# EAGLE board CT_schematic (EAGLE 7.6.0)

Size 100 x 80 mm. Coordinates in mm from the lower left corner, seen from the top.
Outline: 0,0 100,0 100,80 0,80 0,0
Copper layers (1*16): Top 0.035mm / dielectric 1.5mm / Bottom 0.035mm
Design rules "default": minimum track width 10mil, minimum drill 24mil, track to track 8mil, track to pad 8mil, pad to pad 8mil, via to via 8mil, smd to smd 8mil, copper to edge 40mil, drill to drill 8mil, minimum pad ring 10mil, minimum via ring 8mil, stop-mask expansion 4mil, vias tented up to drill 0mil, thermal gap 10mil

## Footprints (pad centres in the part's own frame; a part is rotated, then mirrored left to right if it is on the bottom)
C0603 = smd 0.8 x 0.8: 1 -0.762,0; 2 0.762,0
C0402 = smd 0.5 x 0.5: 1 -0.508,0; 2 0.508,0
C1206 = smd 1.3 x 1.6: 1 -1.524,0; 2 1.524,0
C0805 = smd 1.2 x 1.3: 1 -1.016,0; 2 1.016,0
C1210 = smd 1.2 x 2.5: 1 -1.524,0; 2 1.524,0
R0603 = smd 0.8 x 0.8: 1 -0.762,0; 2 0.762,0
EXV-9H = smd 3.505 x 1.676: 1 -2.857,0; 2 2.857,0
L0603 = smd 0.8 x 0.8: 1 -0.762,0; 2 0.762,0
DR1040 = smd 1.6 x 3.2: 1 -4.458,0; 2 4.458,0
PJ-037B_PACKAGE = drill 3.7 square: 1 12,0 | drill 3.2 square: 2 6,0
UFBGA169 = smd 0.35 x 0.35: A1 -3.9,3.9; A2 -3.25,3.9; A3 -2.6,3.9; A4 -1.95,3.9; A5 -1.3,3.9; A6 -0.65,3.9; A7 0,3.9; A8 0.65,3.9; A9 1.3,3.9; A10 1.95,3.9; A11 2.6,3.9; A12 3.25,3.9; A13 3.9,3.9; B1 -3.9,3.25; B2 -3.25,3.25; B3 -2.6,3.25; B4 -1.95,3.25; B5 -1.3,3.25; B6 -0.65,3.25; B7 0,3.25; B8 0.65,3.25; B9 1.3,3.25; B10 1.95,3.25; B11 2.6,3.25; B12 3.25,3.25; B13 3.9,3.25; C1 -3.9,2.6; C2 -3.25,2.6; C3 -2.6,2.6; C4 -1.95,2.6; C5 -1.3,2.6; C6 -0.65,2.6; C7 0,2.6; C8 0.65,2.6; C9 1.3,2.6; C10 1.95,2.6; C11 2.6,2.6; C12 3.25,2.6; C13 3.9,2.6; D1 -3.9,1.95; D2 -3.25,1.95; D3 -2.6,1.95; D4 -1.95,1.95; D5 -1.3,1.95; D6 -0.65,1.95; D7 0,1.95; D8 0.65,1.95; D9 1.3,1.95; D10 1.95,1.95; D11 2.6,1.95; D12 3.25,1.95; D13 3.9,1.95; E1 -3.9,1.3; E2 -3.25,1.3; E3 -2.6,1.3; E4 -1.95,1.3; E5 -1.3,1.3; E6 -0.65,1.3; E7 0,1.3; E8 0.65,1.3; E9 1.3,1.3; E10 1.95,1.3; E11 2.6,1.3; E12 3.25,1.3; E13 3.9,1.3; F1 -3.9,0.65; F2 -3.25,0.65; F3 -2.6,0.65; F4 -1.95,0.65; F5 -1.3,0.65; F6 -0.65,0.65; F7 0,0.65; F8 0.65,0.65; F9 1.3,0.65; F10 1.95,0.65; F11 2.6,0.65; F12 3.25,0.65; F13 3.9,0.65; G1 -3.9,0; G2 -3.25,0; G3 -2.6,0; G4 -1.95,0; G5 -1.3,0; G6 -0.65,0; G7 0,0; G8 0.65,0; G9 1.3,0; G10 1.95,0; G11 2.6,0; G12 3.25,0; G13 3.9,0; H1 -3.9,-0.65; H2 -3.25,-0.65; H3 -2.6,-0.65; H4 -1.95,-0.65; H5 -1.3,-0.65; H6 -0.65,-0.65; H7 0,-0.65; H8 0.65,-0.65; H9 1.3,-0.65; H10 1.95,-0.65; H11 2.6,-0.65; H12 3.25,-0.65; H13 3.9,-0.65; J1 -3.9,-1.3; J2 -3.25,-1.3; J3 -2.6,-1.3; J4 -1.95,-1.3; J5 -1.3,-1.3; J6 -0.65,-1.3; J7 0,-1.3; J8 0.65,-1.3; J9 1.3,-1.3; J10 1.95,-1.3; J11 2.6,-1.3; J12 3.25,-1.3; J13 3.9,-1.3; K1 -3.9,-1.95; K2 -3.25,-1.95; K3 -2.6,-1.95; K4 -1.95,-1.95; K5 -1.3,-1.95; K6 -0.65,-1.95; K7 0,-1.95; K8 0.65,-1.95; K9 1.3,-1.95; K10 1.95,-1.95; K11 2.6,-1.95; K12 3.25,-1.95; K13 3.9,-1.95; L1 -3.9,-2.6; L2 -3.25,-2.6; L3 -2.6,-2.6; L4 -1.95,-2.6; L5 -1.3,-2.6; L6 -0.65,-2.6; L7 0,-2.6; L8 0.65,-2.6; L9 1.3,-2.6; L10 1.95,-2.6; L11 2.6,-2.6; L12 3.25,-2.6; L13 3.9,-2.6; M1 -3.9,-3.25; M2 -3.25,-3.25; M3 -2.6,-3.25; M4 -1.95,-3.25; M5 -1.3,-3.25; M6 -0.65,-3.25; M7 0,-3.25; M8 0.65,-3.25; M9 1.3,-3.25; M10 1.95,-3.25; M11 2.6,-3.25; M12 3.25,-3.25; M13 3.9,-3.25; N1 -3.9,-3.9; N2 -3.25,-3.9; N3 -2.6,-3.9; N4 -1.95,-3.9; N5 -1.3,-3.9; N6 -0.65,-3.9; N7 0,-3.9; N8 0.65,-3.9; N9 1.3,-3.9; N10 1.95,-3.9; N11 2.6,-3.9; N12 3.25,-3.9; N13 3.9,-3.9
ARDUCAM = drill 1 pad 1.8 square: 1 0,0 | drill 1 pad 1.8: 2 0,2.54; 3 2.54,0; 4 2.54,2.54; 5 5.08,0; 6 5.08,2.54; 7 7.62,0; 8 7.62,2.54; 9 10.16,0; 10 10.16,2.54; 11 12.7,0; 12 12.7,2.54; 13 15.24,0; 14 15.24,2.54; 15 17.78,0; 16 17.78,2.54; 17 20.32,0; 18 20.32,2.54; 19 22.86,0; 20 22.86,2.54
TST-110-05-T-D-RA = drill 1 pad 1.7 square: 1 0,0 | drill 1 pad 1.7: 2 0,2.54; 3 2.54,0; 4 2.54,2.54; 5 5.08,0; 6 5.08,2.54; 7 7.62,0; 8 7.62,2.54; 9 10.16,0; 10 10.16,2.54; 11 12.7,0; 12 12.7,2.54; 13 15.24,0; 14 15.24,2.54; 15 17.78,0; 16 17.78,2.54; 17 20.32,0; 18 20.32,2.54; 19 22.86,0; 20 22.86,2.54
M10382 = smd 1 x 1: 1 0,0; 2 -1.6,0; 3 -3.2,0; 4 -3.2,-2; 5 -3.2,-3.6; 6 -3.2,-5.2; 7 -3.2,-6.8; 8 -3.2,-8.4; 9 -3.2,-10; 10 -3.2,-11.6; 11 -3.2,-13.2; 12 -3.2,-14.8; 13 -3.2,-16.4; 14 -3.2,-18; 15 -3.2,-19.6; 16 -3.2,-21.2; 17 -3.2,-22.8; 18 -0.55,-22.8; 19 1.05,-22.8; 20 2.65,-22.8; 21 5.3,-22.8; 22 5.3,-21.2; 23 5.3,-19.6; 24 5.3,-18; 25 5.3,-16.4; 26 5.3,-14.8; 27 5.3,-13.2; 28 5.3,-11.6; 29 5.3,-10; 30 5.3,-8.4; 31 5.3,-6.8; 32 5.3,-5.2; 33 5.3,-3.6; 34 5.3,-2; 35 5.3,0; 36 3.7,0
RTL8201FL-VB-CG = smd 0.27 x 1: 1 0,0; 2 0.5,0; 3 1,0; 4 1.5,0; 5 2,0; 6 2.5,0; 7 3,0; 8 3.5,0; 9 4,0; 10 4.5,0; 11 5,0; 12 5.5,0; 25 5.5,8; 26 5,8; 27 4.5,8; 28 4,8; 29 3.5,8; 30 3,8; 31 2.5,8; 32 2,8; 33 1.5,8; 34 1,8; 35 0.5,8; 36 0,8 | smd 1 x 0.27: 13 6.75,1.25; 14 6.75,1.75; 15 6.75,2.25; 16 6.75,2.75; 17 6.75,3.25; 18 6.75,3.75; 19 6.75,4.25; 20 6.75,4.75; 21 6.75,5.25; 22 6.75,5.75; 23 6.75,6.25; 24 6.75,6.75; 37 -1.25,6.75; 38 -1.25,6.25; 39 -1.25,5.75; 40 -1.25,5.25; 41 -1.25,4.75; 42 -1.25,4.25; 43 -1.25,3.75; 44 -1.25,3.25; 45 -1.25,2.75; 46 -1.25,2.25; 47 -1.25,1.75; 48 -1.25,1.25
7498011122R = smd 0.71 x 2.29: 1 -3.545,-3.18; 2 -2.525,-3.18; 3 -1.505,-3.18; 4 -0.485,-3.18; 5 0.535,-3.18; 6 1.555,-3.18; 8 3.595,-3.18; 9 5.635,-3.18; 10 6.655,-3.18; 11 -6.605,-3.18; 12 -5.585,-3.18 | smd 1.4 x 2.54: 13 -8.51,10.2; 14 8.51,10.2 | hole 1.4: -3.5,0; 3.5,0
ABS07-32.768KHZ-7-T = smd 1.1 x 2.4: 1 -2.5,0; 2 0,0
ABLS-25.000MHZ-B2F-T = smd 5.6 x 2.8: 1 -3.81,0; 2 5.69,0
ASFL1 = smd 1.7 x 1.5: 1 -1.27,-1.1; 2 1.27,-1.1; 3 1.27,1.1; 4 -1.27,1.1
IDT74FCT38072 = smd 0.51 x 1: 1 0,0; 2 1.27,0; 3 2.54,0; 4 3.81,0; 5 3.81,4.95; 6 2.54,4.95; 7 1.27,4.95; 8 0,4.95
WSON-8 = smd 0.3 x 0.6: 1 -0.75,0; 2 0.05,0; 3 0.85,0; 4 1.65,0; 5 1.65,3.8; 6 0.85,3.8; 7 0.05,3.8; 8 -0.75,3.8 | smd 3 x 2.6: PAD 0.45,1.9
HTSSOP14 = smd 1.676 x 0.356: 1 -2.8,1.95; 2 -2.8,1.3; 3 -2.8,0.65; 4 -2.8,0; 5 -2.8,-0.65; 6 -2.8,-1.3; 7 -2.8,-1.95; 8 2.8,-1.95; 9 2.8,-1.3; 10 2.8,-0.65; 11 2.8,0; 12 2.8,0.65; 13 2.8,1.3; 14 2.8,1.95 | smd 3 x 5: 15 0,0 | drill 0.4 pad 0.45: P$1 -0.75,1.5; P$2 0.75,1.5; P$3 -0.75,0; P$4 0.8,0; P$5 -0.75,-1.5; P$6 0.9,-1.5
QFN-38_UHF = smd 0.75 x 0.3: 1 -2.4,2.75; 2 -2.4,2.25; 3 -2.4,1.75; 4 -2.4,1.25; 6 -2.4,0.25; 7 -2.4,-0.25; 8 -2.4,-0.75; 9 -2.4,-1.25; 10 -2.4,-1.75; 11 -2.4,-2.25; 12 -2.4,-2.75; 20 2.4,-2.75; 21 2.4,-2.25; 22 2.4,-1.75; 23 2.4,-1.25; 24 2.4,-0.75; 25 2.4,-0.25; 26 2.4,0.25; 27 2.4,0.75; 28 2.4,1.25; 29 2.4,1.75; 30 2.4,2.25; 31 2.4,2.75 | smd 0.758 x 0.3: 5 -2.4,0.75 | smd 0.3 x 0.75: 13 -1.5,-3.4; 14 -1,-3.4; 15 -0.5,-3.4; 16 0,-3.4; 17 0.5,-3.4; 18 1,-3.4; 19 1.5,-3.4; 32 1.5,3.4; 33 1,3.4; 34 0.5,3.4; 35 0,3.4; 36 -0.5,3.4; 37 -1,3.4; 38 -1.5,3.4 | smd 3.2 x 5.2: 39 0,0
IRF8306MTRPBF = smd 0.9 x 1.85: 1 0,0; 2 0,-2.35; 6 6.4,0; 7 6.4,-2.35 | smd 0.75 x 0.75: 3 1.75,-1.175 | smd 1.45 x 0.87: 4 3.5,-0.565; 5 3.5,-1.785
SW_4-1437565-2 = smd 1.4 x 2.1: 1 -2.23,4.55; 2 -2.23,-4.55; 3 2.23,4.55; 4 2.23,-4.55
LGM67K-G1J2-24-Z = smd 0.8 x 1.4: A -2,0; C 0,0
NC7SZ125M5X = smd 1.3 x 0.7: 1 -1.3,0.95; 2 -1.3,0; 3 -1.3,-0.95; 4 1.3,-0.95; 5 1.3,0.95

## Placement (x,y rotation side)
C1  1e-06  [C0603]  -26.67,83.82 0 top  (outside the outline)
C2  1e-07  [C0603]  -30.48,83.82 0 top  (outside the outline)
C3  1e-07  [C0603]  -34.29,83.82 0 top  (outside the outline)
C4  1e-07  [C0603]  -38.1,83.82 0 top  (outside the outline)
C5  1e-07  [C0603]  -41.91,83.82 0 top  (outside the outline)
C6  1e-07  [C0603]  -45.72,83.82 0 top  (outside the outline)
C7  1e-07  [C0603]  -49.53,83.82 0 top  (outside the outline)
C8  1e-07  [C0603]  -53.34,83.82 0 top  (outside the outline)
C9  1e-07  [C0603]  -57.15,83.82 0 top  (outside the outline)
C10  1e-07  [C0603]  -60.96,83.82 0 top  (outside the outline)
C11  1e-07  [C0603]  -64.77,83.82 0 top  (outside the outline)
C12  1e-07  [C0603]  -68.58,83.82 0 top  (outside the outline)
C13  1e-07  [C0603]  -72.39,83.82 0 top  (outside the outline)
C14  1e-07  [C0603]  -76.2,83.82 0 top  (outside the outline)
C15  1e-07  [C0603]  -80.01,83.82 0 top  (outside the outline)
C16  1e-07  [C0603]  -83.82,83.82 0 top  (outside the outline)
C17  4.7e-06  [C0603]  -19.05,83.82 0 top  (outside the outline)
C18  1e-08  [C0603]  -87.63,83.82 0 top  (outside the outline)
C19  1e-06  [C0603]  -91.44,83.82 0 top  (outside the outline)
C20  1e-07  [C0402]  -50.8,93.98 0 top  (outside the outline)
C21  1e-07  [C0402]  -54.61,93.98 0 top  (outside the outline)
C22  1e-11  [C0402]  -58.42,93.98 0 top  (outside the outline)
C23  1e-11  [C0402]  -62.23,93.98 0 top  (outside the outline)
C24  1e-06  [C0603]  -15.24,88.9 0 top  (outside the outline)
C25  1e-07  [C0402]  -66.04,93.98 0 top  (outside the outline)
C26  1e-07  [C0402]  -69.85,93.98 0 top  (outside the outline)
C27  2.2e-11  [C0402]  -27.94,93.98 0 top  (outside the outline)
C28  2.2e-11  [C0402]  -31.75,93.98 0 top  (outside the outline)
C29  2.2e-08  [C0402]  -35.56,93.98 0 top  (outside the outline)
C30  1e-06  [C0603]  -19.05,88.9 0 top  (outside the outline)
C31  1e-07  [C0402]  -73.66,93.98 0 top  (outside the outline)
C32  1e-08  [C0402]  -77.47,93.98 0 top  (outside the outline)
C33  1e-06  [C0603]  -22.86,88.9 0 top  (outside the outline)
C34  1e-07  [C0402]  -81.28,93.98 0 top  (outside the outline)
C35  1e-08  [C0402]  -85.09,93.98 0 top  (outside the outline)
C36  1e-07  [C0402]  -88.9,93.98 0 top  (outside the outline)
C37  1e-07  [C0402]  -15.24,99.06 0 top  (outside the outline)
C38  2.7e-11  [C0402]  -39.37,93.98 0 top  (outside the outline)
C39  2.7e-11  [C0402]  -43.18,93.98 0 top  (outside the outline)
C40  1e-08  [C0402]  -19.05,99.06 0 top  (outside the outline)
C41  1e-08  [C0402]  -22.86,99.06 0 top  (outside the outline)
C42  1e-08  [C0402]  -26.67,99.06 0 top  (outside the outline)
C43  1e-05  [C1206]  -22.86,68.58 0 top  (outside the outline)
C44  1e-05  [C0805]  -59.69,67.31 0 top  (outside the outline)
C45  1e-06  [C0603]  -26.67,88.9 0 top  (outside the outline)
C46  3.3e-09  [C0402]  -46.99,93.98 0 top  (outside the outline)
C47  1e-07  [C0402]  -30.48,99.06 0 top  (outside the outline)
C48  2.2e-05  [C1210]  -87.63,60.96 0 top  (outside the outline)
C49  2.2e-05  [C1210]  -16.51,68.58 0 top  (outside the outline)
C50  1e-05  [C0805]  -64.77,67.31 0 top  (outside the outline)
C51  1e-05  [C0805]  -69.85,67.31 0 top  (outside the outline)
C52  1e-08  [C0402]  -34.29,99.06 0 top  (outside the outline)
C53  1e-05  [C1206]  -29.21,68.58 0 top  (outside the outline)
C54  1e-05  [C0805]  -74.93,67.31 0 top  (outside the outline)
C55  1e-07  [C0402]  -38.1,99.06 0 top  (outside the outline)
C56  2.2e-06  [C0603]  -22.86,83.82 0 top  (outside the outline)
C57  2.45e-08  [R0603]  -39.37,73.66 0 top  (outside the outline)
C58  2.8258362168397e-09  [R0603]  -85.09,67.31 0 top  (outside the outline)
C59  7.105e-09  [R0603]  -24.13,73.66 0 top  (outside the outline)
C60  0.0001  [EXV-9H]  -54.61,53.34 0 top  (outside the outline)
C61  0.0001  [EXV-9H]  -66.04,53.34 0 top  (outside the outline)
C62  1e-08  [C0402]  -41.91,99.06 0 top  (outside the outline)
C63  1e-08  [C0402]  -45.72,99.06 0 top  (outside the outline)
C64  1e-08  [C0402]  -49.53,99.06 0 top  (outside the outline)
C65  1e-08  [C0402]  -53.34,99.06 0 top  (outside the outline)
F1  240.0  [L0603]  -30.48,88.9 0 top  (outside the outline)
I1  97.0  [R0603]  -34.29,88.9 0 top  (outside the outline)
I5  2.5e-06  [DR1040]  -38.1,34.29 0 top  (outside the outline)
J1  PJ-037B  [PJ-037B_PACKAGE]  -90.17,7.62 0 top  (outside the outline)
R2  1000.0  [R0603]  -38.1,88.9 0 top  (outside the outline)
R7  4700.0  [R0603]  -41.91,88.9 0 top  (outside the outline)
R8  4700.0  [R0603]  -45.72,88.9 0 top  (outside the outline)
R9  4700.0  [R0603]  -49.53,88.9 0 top  (outside the outline)
R10  2200.0  [R0603]  -53.34,88.9 0 top  (outside the outline)
R12  2200.0  [R0603]  -57.15,88.9 0 top  (outside the outline)
R14  2200.0  [R0603]  -60.96,88.9 0 top  (outside the outline)
R16  2200.0  [R0603]  -64.77,88.9 0 top  (outside the outline)
R18  10000.0  [R0603]  -44.45,73.66 0 top  (outside the outline)
R19  10000.0  [R0603]  -49.53,73.66 0 top  (outside the outline)
R20  10000.0  [R0603]  -54.61,73.66 0 top  (outside the outline)
R21  10000.0  [R0603]  -59.69,73.66 0 top  (outside the outline)
R22  10000.0  [R0603]  -64.77,73.66 0 top  (outside the outline)
R23  10000.0  [R0603]  -69.85,73.66 0 top  (outside the outline)
R24  10000.0  [R0603]  -74.93,73.66 0 top  (outside the outline)
R25  10000.0  [R0603]  -80.01,73.66 0 top  (outside the outline)
R26  10000.0  [R0603]  -85.09,73.66 0 top  (outside the outline)
R27  10000.0  [R0603]  -90.17,73.66 0 top  (outside the outline)
R28  0.1  [R0603]  -68.58,88.9 0 top  (outside the outline)
R29  0.1  [R0603]  -72.39,88.9 0 top  (outside the outline)
R30  200.0  [R0603]  -76.2,88.9 0 top  (outside the outline)
R31  200.0  [R0603]  -80.01,88.9 0 top  (outside the outline)
R32  2490.0  [R0603]  -83.82,88.9 0 top  (outside the outline)
R33  4700.0  [R0603]  -87.63,88.9 0 top  (outside the outline)
R34  10000.0  [R0603]  -15.24,78.74 0 top  (outside the outline)
R35  10000.0  [R0603]  -20.32,78.74 0 top  (outside the outline)
R36  10000.0  [R0603]  -25.4,78.74 0 top  (outside the outline)
R37  10000.0  [R0603]  -30.48,78.74 0 top  (outside the outline)
R38  10000.0  [R0603]  -35.56,78.74 0 top  (outside the outline)
R39  10000.0  [R0603]  -40.64,78.74 0 top  (outside the outline)
R40  100000.0  [R0603]  -29.21,73.66 0 top  (outside the outline)
R41  200.0  [R0603]  -91.44,88.9 0 top  (outside the outline)
R42  1000.0  [R0603]  -15.24,93.98 0 top  (outside the outline)
R43  71007.101651032  [R0603]  -19.05,73.66 0 top  (outside the outline)
R44  22000.0  [R0603]  -45.72,78.74 0 top  (outside the outline)
R45  100000.0  [R0603]  -34.29,73.66 0 top  (outside the outline)
R46  200.0  [R0603]  -19.05,93.98 0 top  (outside the outline)
R47  1000.0  [R0603]  -22.86,93.98 0 top  (outside the outline)
R48  10000.0  [R0603]  -50.8,78.74 0 top  (outside the outline)
R49  75000.0  [R0603]  -55.88,78.74 0 top  (outside the outline)
R50  10000.0  [R0603]  -60.96,78.74 0 top  (outside the outline)
R51  10000.0  [R0603]  -66.04,78.74 0 top  (outside the outline)
R52  95300.0  [R0603]  -71.12,78.74 0 top  (outside the outline)
R53  95300.0  [R0603]  -76.2,78.74 0 top  (outside the outline)
R54  10000.0  [R0603]  -81.28,78.74 0 top  (outside the outline)
R55  10000.0  [R0603]  -86.36,78.74 0 top  (outside the outline)
R56  10000.0  [R0603]  -91.44,78.74 0 top  (outside the outline)
R57  48900.0  [R0603]  -15.24,83.82 0 top  (outside the outline)
U1  STM32F437AIH6  [UFBGA169]  -53.34,7.62 0 top  (outside the outline)
U2  arducam_ov2640  [ARDUCAM]  -59.69,58.42 0 top  (outside the outline)
U3  TST-110-05-T-D-RA  [TST-110-05-T-D-RA]  -46.99,50.8 0 top  (outside the outline)
U4  M10382  [M10382]  -39.37,24.13 0 top  (outside the outline)
U5  RTL8201FL-VB-CG  [RTL8201FL-VB-CG]  -73.66,3.81 0 top  (outside the outline)
U6  7498011122R  [7498011122R]  -22.86,7.62 0 top  (outside the outline)
U7  ABS07-32.768KHZ-7-T  [ABS07-32.768KHZ-7-T]  -27.94,60.96 0 top  (outside the outline)
U8  ABLS-25.000MHZ-B2F-T  [ABLS-25.000MHZ-B2F-T]  -85.09,53.34 0 top  (outside the outline)
U9  ASFL1-25MHZ-NCS  [ASFL1]  -46.99,44.45 0 top  (outside the outline)
U10  idt74fct38072  [IDT74FCT38072]  -76.2,41.91 0 top  (outside the outline)
U11  LP3878SDX-ADJ/NOPB  [WSON-8]  -91.44,31.75 0 top  (outside the outline)
U12  tps54325PWP  [HTSSOP14]  -67.31,60.96 0 top  (outside the outline)
U13  LP3878SDX-ADJ/NOPB  [WSON-8]  -30.48,43.18 0 top  (outside the outline)
U14  LTC2928CUHF#PBF  [QFN-38_UHF]  -54.61,44.45 0 top  (outside the outline)
U15  IRF8306MTRPbF  [IRF8306MTRPBF]  -57.15,34.29 0 top  (outside the outline)
U16  IRF8306MTRPbF  [IRF8306MTRPBF]  -72.39,34.29 0 top  (outside the outline)
U17  4-1437565-2  [SW_4-1437565-2]  -27.94,34.29 0 top  (outside the outline)
U18  Q65110A2395  [LGM67K-G1J2-24-Z]  -76.2,60.96 0 top  (outside the outline)
U19  nc7sz125m5x  [NC7SZ125M5X]  -34.29,67.31 0 top  (outside the outline)
U20  nc7sz125m5x  [NC7SZ125M5X]  -40.64,67.31 0 top  (outside the outline)
U21  nc7sz125m5x  [NC7SZ125M5X]  -46.99,67.31 0 top  (outside the outline)
U22  nc7sz125m5x  [NC7SZ125M5X]  -53.34,67.31 0 top  (outside the outline)

## Library data of the parts
C1-C65 F1 I1 I5 J1 R2 R7-R10 R12 R14 R16 R18-R57 U1-U22 = circuit_tree

## Nets
CLK_CRYSTAL_U1_E1: C22.1 U1.E1 U7.1
CLK_CRYSTAL_U1_F1: C23.1 U1.F1 U7.2
CLK_CRYSTAL_U5_42: C39.1 U5.42 U8.1
CLK_CRYSTAL_U5_43: C38.1 U5.43 U8.2
CLK_U1_G2: U1.G2 U10.6
CLK_U2_8: U2.8 U10.7
CLK_U10_3: U9.3 U10.3
GND: C1.2 C2.2 C3.2 C4.2 C5.2 C6.2 C7.2 C8.2 C9.2 C10.2 C11.2 C12.2 C13.2 C14.2 C15.2 C16.2 C17.2 C18.2 C19.2 C20.2 C21.2 C22.2 C23.2 C24.2 C25.2 C26.2 C27.2 C28.2 C29.2 C30.2 C31.2 C32.2 C33.2 C34.2 C35.2 C36.2 C37.2 C38.2 C39.2 C40.2 C41.2 C42.2 C43.2 C44.2 C45.2 C46.2 C48.2 C49.2 C50.2 C51.2 C52.2 C53.2 C54.2 C55.2 C56.2 C57.2 C58.2 C59.2 C60.2 C61.2 C62.2 C63.2 C64.2 C65.2 J1.2 R2.2 R20.2 R27.2 R28.2 R29.2 R32.2 R34.2 R36.2 R37.2 R38.2 R39.2 R42.2 R44.2 R47.2 R49.2 R52.2 R53.2 R54.2 R55.2 R56.2 U1.D7 U1.D11 U1.E7 U1.F5 U1.F6 U1.G7 U1.G9 U1.J1 U1.J2 U1.J6 U1.J7 U1.J10 U2.2 U2.20 U3.4 U3.6 U3.8 U3.10 U3.12 U3.14 U3.16 U3.18 U3.20 U4.2 U4.4 U4.14 U4.17 U4.21 U4.24 U4.26 U4.28 U4.33 U4.34 U4.35 U4.36 U5.7 U5.20 U5.33 U5.47 U6.11 U9.2 U10.4 U10.5 U10.8 U11.3 U11.PAD U12.5 U12.8 U12.9 U12.15 U13.3 U13.PAD U14.8 U14.9 U14.10 U14.12 U14.13 U14.24 U14.25 U14.30 U14.32 U14.39 U18.C U19.2 U19.3 U20.1 U20.3 U21.1 U21.3 U22.1 U22.3
NET_U1_A5: R19.1 U1.A5
NET_U1_B5: R12.1 U1.B5 U4.18
NET_U1_C3: R18.1 U1.C3
NET_U1_C5: R10.1 U1.C5 U4.19
NET_U1_D12: C21.1 U1.D12
NET_U1_H2: R8.1 U1.H2 U21.4
NET_U1_H5: R14.1 U1.H5 U5.30
NET_U1_J4: C18.1 C19.1 F1.1 U1.J3 U1.J4
NET_U1_K2: R16.1 U1.K2 U5.31
NET_U1_L5: R20.1 U1.L5
NET_U1_M1: R21.1 U1.M1
NET_U1_N10: U18.A
NET_U1_N11: U17.3 U17.4
NET_U2_19: R9.1 U2.19 U22.4
NET_U3_19: R27.1 U3.19
NET_U5_6: C30.1 C31.1 C32.1 I1.1 U5.6 U5.41
NET_U5_10: R37.1 U5.10
NET_U5_28: U5.28
NET_U5_29: R7.1 U5.29 U20.4
NET_U5_32: R33.1 U5.32
NET_U5_34: R35.1 U5.34
NET_U5_35: R36.1 U5.35
NET_U5_40: C37.1 U5.40
NET_U5_46: R32.1 U5.46
NET_U5_48: C36.1 U5.48
NET_U6_1: U5.1 U6.1
NET_U6_3: U5.2 U6.3
NET_U6_4: U5.4 U6.4
NET_U6_5: C29.1 U6.2 U6.5
NET_U6_6: U5.5 U6.6
NET_U6_8: R29.1 U6.8
NET_U6_10: R30.1 U6.10
NET_U6_12: R31.1 U6.12
NET_U6_13: R28.1 U6.13 U6.14
NET_U6_34: R30.2
NET_U6_35: R31.2
NET_U11_1: C42.1 U11.1
NET_U11_6: R41.2 R42.1 U11.6
NET_U11_8: R40.1 U11.8
NET_U12_2: R43.2 R44.1 U12.2
NET_U12_3: C45.1 U12.3
NET_U12_4: C46.1 U12.4
NET_U12_10: C47.1 I5.1 U12.10 U12.11
NET_U12_12: C47.2 U12.12
NET_U13_1: C52.1 U13.1
NET_U13_6: R46.2 R47.1 U13.6
NET_U13_8: R45.1 U13.8
NET_U14_3: R55.1 U14.3
NET_U14_6: R52.1 U14.6
NET_U14_7: R53.1 U14.7
NET_U14_16: R54.1 R57.1 U14.16
NET_U14_18: R51.1 U14.18
NET_U14_19: R50.1 U14.19 U14.20
NET_U14_21: R48.1 R49.1 U14.21 U19.4 U20.2 U21.2 U22.2
NET_U14_26: C58.1 U14.26
NET_U14_27: C57.1 U14.27
NET_U14_28: C59.1 U14.28
NET_U14_38: R56.1 U14.38
NET_U15_3: U14.2 U15.3
NET_U16_3: U14.37 U16.3
NET_U17_1: R2.1 U17.1 U17.2
PROC_DCMI_D0: U1.E8 U2.18
PROC_DCMI_D1: U1.E9 U2.17
PROC_DCMI_D2: U1.B4 U2.16
PROC_DCMI_D3: U1.A4 U2.15
PROC_DCMI_D4: U1.B10 U2.14
PROC_DCMI_D5: U1.A9 U2.13
PROC_DCMI_D6: U1.A2 U2.12
PROC_DCMI_D7: U1.B1 U2.11
PROC_DCMI_D8: U1.C10 U2.10
PROC_DCMI_D9: U1.A10 U2.9
PROC_DCMI_HSYNC: U1.L10 U2.6
PROC_DCMI_PIXCK: U1.N3 U2.7
PROC_DCMI_VSYNC: U1.A3 U2.5
PROC_ETH_COL: U1.K3 U5.38
PROC_ETH_CRS: U1.L2 U5.36
PROC_ETH_RX_CLK: U1.K1 U5.19
PROC_ETH_RX_DV: R34.1 U1.K4 U5.13
PROC_ETH_RX_ER: R39.1 U1.E3 U5.39
PROC_ETH_RXD0: U5.14
PROC_ETH_RXD1: U5.16
PROC_ETH_RXD2: U5.17
PROC_ETH_RXD3: R38.1 U1.K5 U5.18
PROC_ETH_TX_CLK: U1.H7 U5.22
PROC_ETH_TX_EN: U1.B7 U5.27
PROC_ETH_TXD0: U5.23
PROC_ETH_TXD1: U5.24
PROC_ETH_TXD2: U1.H6 U5.25
PROC_ETH_TXD3: U1.B2 U5.26
PROC_SYS_JTCK_SWCLK: R25.1 U1.A11 U3.9
PROC_SYS_JTDI: R23.1 U1.B11 U3.5
PROC_SYS_JTDO_SWO: U1.B6 U3.13
PROC_SYS_JTMS_SWDIO: R24.1 U1.E12 U3.7
PROC_SYS_JTRST: R22.1 U1.A6 U3.3
RST_OUT_U3_SRESET_B: R26.1 U3.15 U19.1
VCC_6V4: C55.1 C56.1 C60.1 C61.1 J1.1 R48.2 R50.2 R51.2 R57.2 U14.11 U14.22 U15.1 U15.2 U15.6 U15.7 U16.1 U16.2 U16.6 U16.7
VCC_S1_6V4: C43.1 C50.1 C51.1 R40.2 U11.4 U12.7 U12.13 U12.14 U15.4 U15.5
VCC_S2_6V4: C53.1 R45.2 U13.4 U16.4 U16.5
VCC_TIER1_1V2: C20.1 C44.1 R41.1 U1.N9 U11.5
VCC_TIER1_3V3: C1.1 C2.1 C3.1 C4.1 C5.1 C6.1 C7.1 C8.1 C9.1 C10.1 C11.1 C12.1 C13.1 C14.1 C15.1 C16.1 C17.1 C24.1 C25.1 C26.1 C27.1 C28.1 C33.1 C34.1 C35.1 C40.1 C41.1 C48.1 C49.1 C62.1 C63.1 C64.1 C65.1 F1.2 I1.2 I5.2 R7.2 R8.2 R9.2 R10.2 R12.2 R14.2 R16.2 R18.2 R19.2 R21.2 R22.2 R23.2 R24.2 R25.2 R26.2 R33.2 R35.2 R43.1 U1.D3 U1.D6 U1.D10 U1.E5 U1.E6 U1.F4 U1.F7 U1.F8 U1.G8 U1.G10 U1.H4 U1.H8 U1.J11 U1.K6 U1.L6 U2.1 U3.1 U3.2 U4.5 U4.25 U4.27 U5.15 U5.21 U5.37 U9.4 U10.1 U10.2 U12.1 U19.5 U20.5 U21.5 U22.5
VCC_TIER2_1V2: C54.1 R46.1 U13.5

## Tracks (layer width: path | path; a pad name or v marks a point on that pad's centre or on a via)
CLK_CRYSTAL_U1_E1  (2 unrouted)
CLK_CRYSTAL_U1_F1  (2 unrouted)
CLK_CRYSTAL_U5_42  (2 unrouted)
CLK_CRYSTAL_U5_43  (2 unrouted)
CLK_U1_G2  (1 unrouted)
CLK_U2_8  (1 unrouted)
CLK_U10_3  (1 unrouted)
GND  (155 unrouted)
NET_U1_A5  (1 unrouted)
NET_U1_B5  (2 unrouted)
NET_U1_C3  (1 unrouted)
NET_U1_C5  (2 unrouted)
NET_U1_D12  (1 unrouted)
NET_U1_H2  (2 unrouted)
NET_U1_H5  (2 unrouted)
NET_U1_J4  (4 unrouted)
NET_U1_K2  (2 unrouted)
NET_U1_L5  (1 unrouted)
NET_U1_M1  (1 unrouted)
NET_U1_N11  (1 unrouted)
NET_U2_19  (2 unrouted)
NET_U3_19  (1 unrouted)
NET_U5_6  (5 unrouted)
NET_U5_10  (1 unrouted)
NET_U5_29  (2 unrouted)
NET_U5_32  (1 unrouted)
NET_U5_34  (1 unrouted)
NET_U5_35  (1 unrouted)
NET_U5_40  (1 unrouted)
NET_U5_46  (1 unrouted)
NET_U5_48  (1 unrouted)
NET_U6_1  (1 unrouted)
NET_U6_3  (1 unrouted)
NET_U6_4  (1 unrouted)
NET_U6_5  (2 unrouted)
NET_U6_6  (1 unrouted)
NET_U6_8  (1 unrouted)
NET_U6_10  (1 unrouted)
NET_U6_12  (1 unrouted)
NET_U6_13  (2 unrouted)
NET_U11_1  (1 unrouted)
NET_U11_6  (2 unrouted)
NET_U11_8  (1 unrouted)
NET_U12_2  (2 unrouted)
NET_U12_3  (1 unrouted)
NET_U12_4  (1 unrouted)
NET_U12_10  (3 unrouted)
NET_U12_12  (1 unrouted)
NET_U13_1  (1 unrouted)
NET_U13_6  (2 unrouted)
NET_U13_8  (1 unrouted)
NET_U14_3  (1 unrouted)
NET_U14_6  (1 unrouted)
NET_U14_7  (1 unrouted)
NET_U14_16  (2 unrouted)
NET_U14_18  (1 unrouted)
NET_U14_19  (2 unrouted)
NET_U14_21  (6 unrouted)
NET_U14_26  (1 unrouted)
NET_U14_27  (1 unrouted)
NET_U14_28  (1 unrouted)
NET_U14_38  (1 unrouted)
NET_U15_3  (1 unrouted)
NET_U16_3  (1 unrouted)
NET_U17_1  (2 unrouted)
PROC_DCMI_D0  (1 unrouted)
PROC_DCMI_D1  (1 unrouted)
PROC_DCMI_D2  (1 unrouted)
PROC_DCMI_D3  (1 unrouted)
PROC_DCMI_D4  (1 unrouted)
PROC_DCMI_D5  (1 unrouted)
PROC_DCMI_D6  (1 unrouted)
PROC_DCMI_D7  (1 unrouted)
PROC_DCMI_D8  (1 unrouted)
PROC_DCMI_D9  (1 unrouted)
PROC_DCMI_HSYNC  (1 unrouted)
PROC_DCMI_PIXCK  (1 unrouted)
PROC_DCMI_VSYNC  (1 unrouted)
PROC_ETH_COL  (1 unrouted)
PROC_ETH_CRS  (1 unrouted)
PROC_ETH_RX_CLK  (1 unrouted)
PROC_ETH_RX_DV  (2 unrouted)
PROC_ETH_RX_ER  (2 unrouted)
PROC_ETH_RXD3  (2 unrouted)
PROC_ETH_TX_CLK  (1 unrouted)
PROC_ETH_TX_EN  (1 unrouted)
PROC_ETH_TXD2  (1 unrouted)
PROC_ETH_TXD3  (1 unrouted)
PROC_SYS_JTCK_SWCLK  (2 unrouted)
PROC_SYS_JTDI  (2 unrouted)
PROC_SYS_JTDO_SWO  (1 unrouted)
PROC_SYS_JTMS_SWDIO  (2 unrouted)
PROC_SYS_JTRST  (2 unrouted)
RST_OUT_U3_SRESET_B  (2 unrouted)
VCC_6V4  (18 unrouted)
VCC_S1_6V4  (9 unrouted)
VCC_S2_6V4  (4 unrouted)
VCC_TIER1_1V2  (4 unrouted)
VCC_TIER1_3V3  (85 unrouted)
VCC_TIER2_1V2  (2 unrouted)